# Altium PCB ECE315.PcbDoc (part 1 of 2)
Units mm, origin at the board's own origin, x right, y up, seen from the top; angles counter-clockwise.
Board outline 100.25 x 100.25 mm, 2 copper layers (Top Layer, Bottom Layer); 67 components, 52 nets, 224 pads, 120 vias.
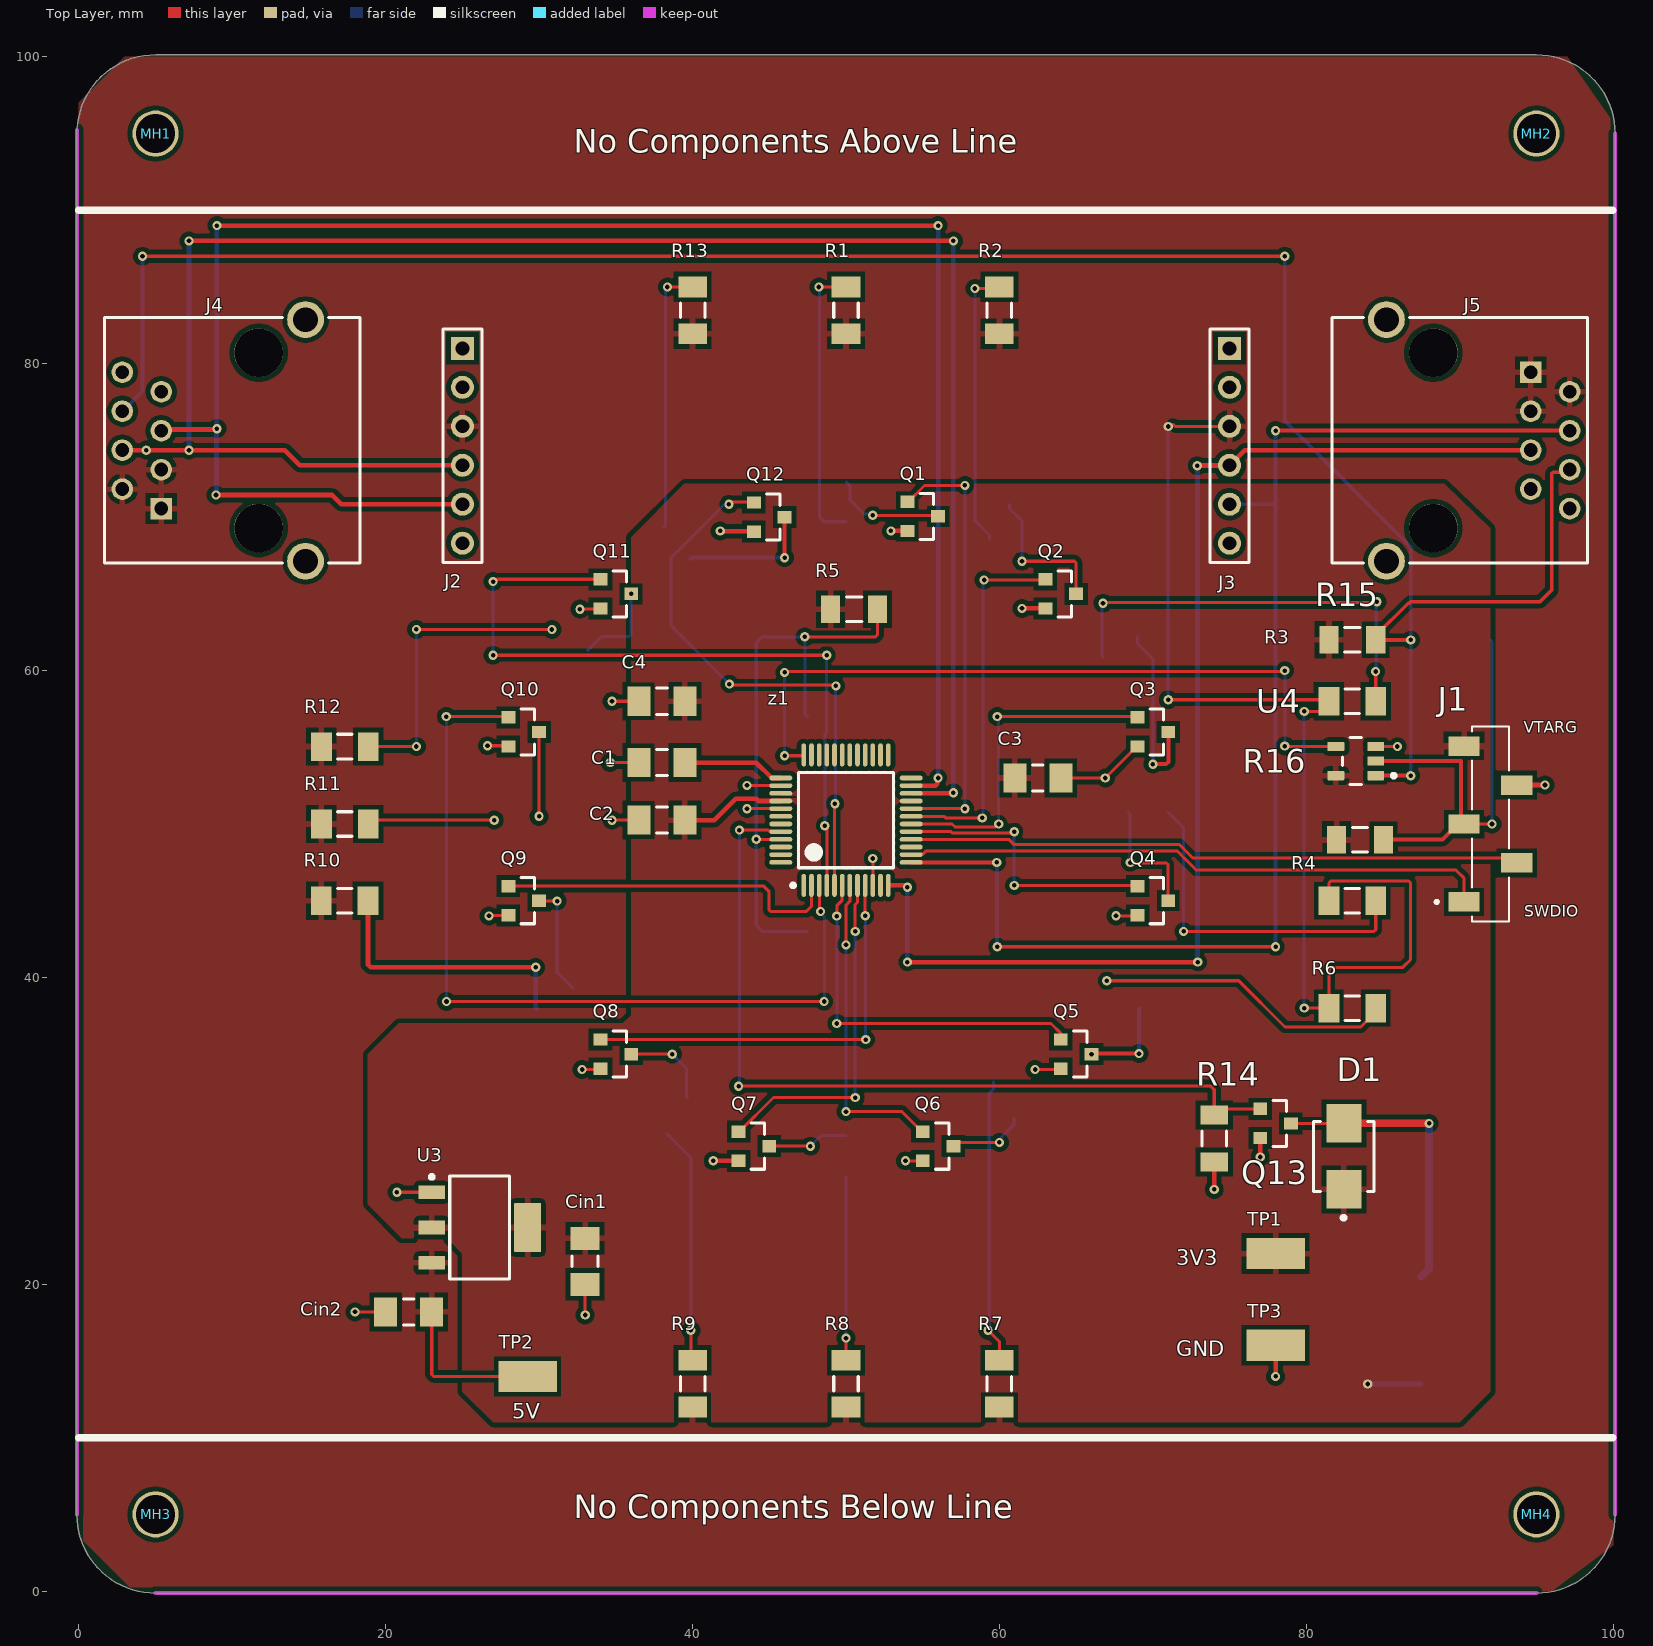
[diagram p0: Top Layer view]
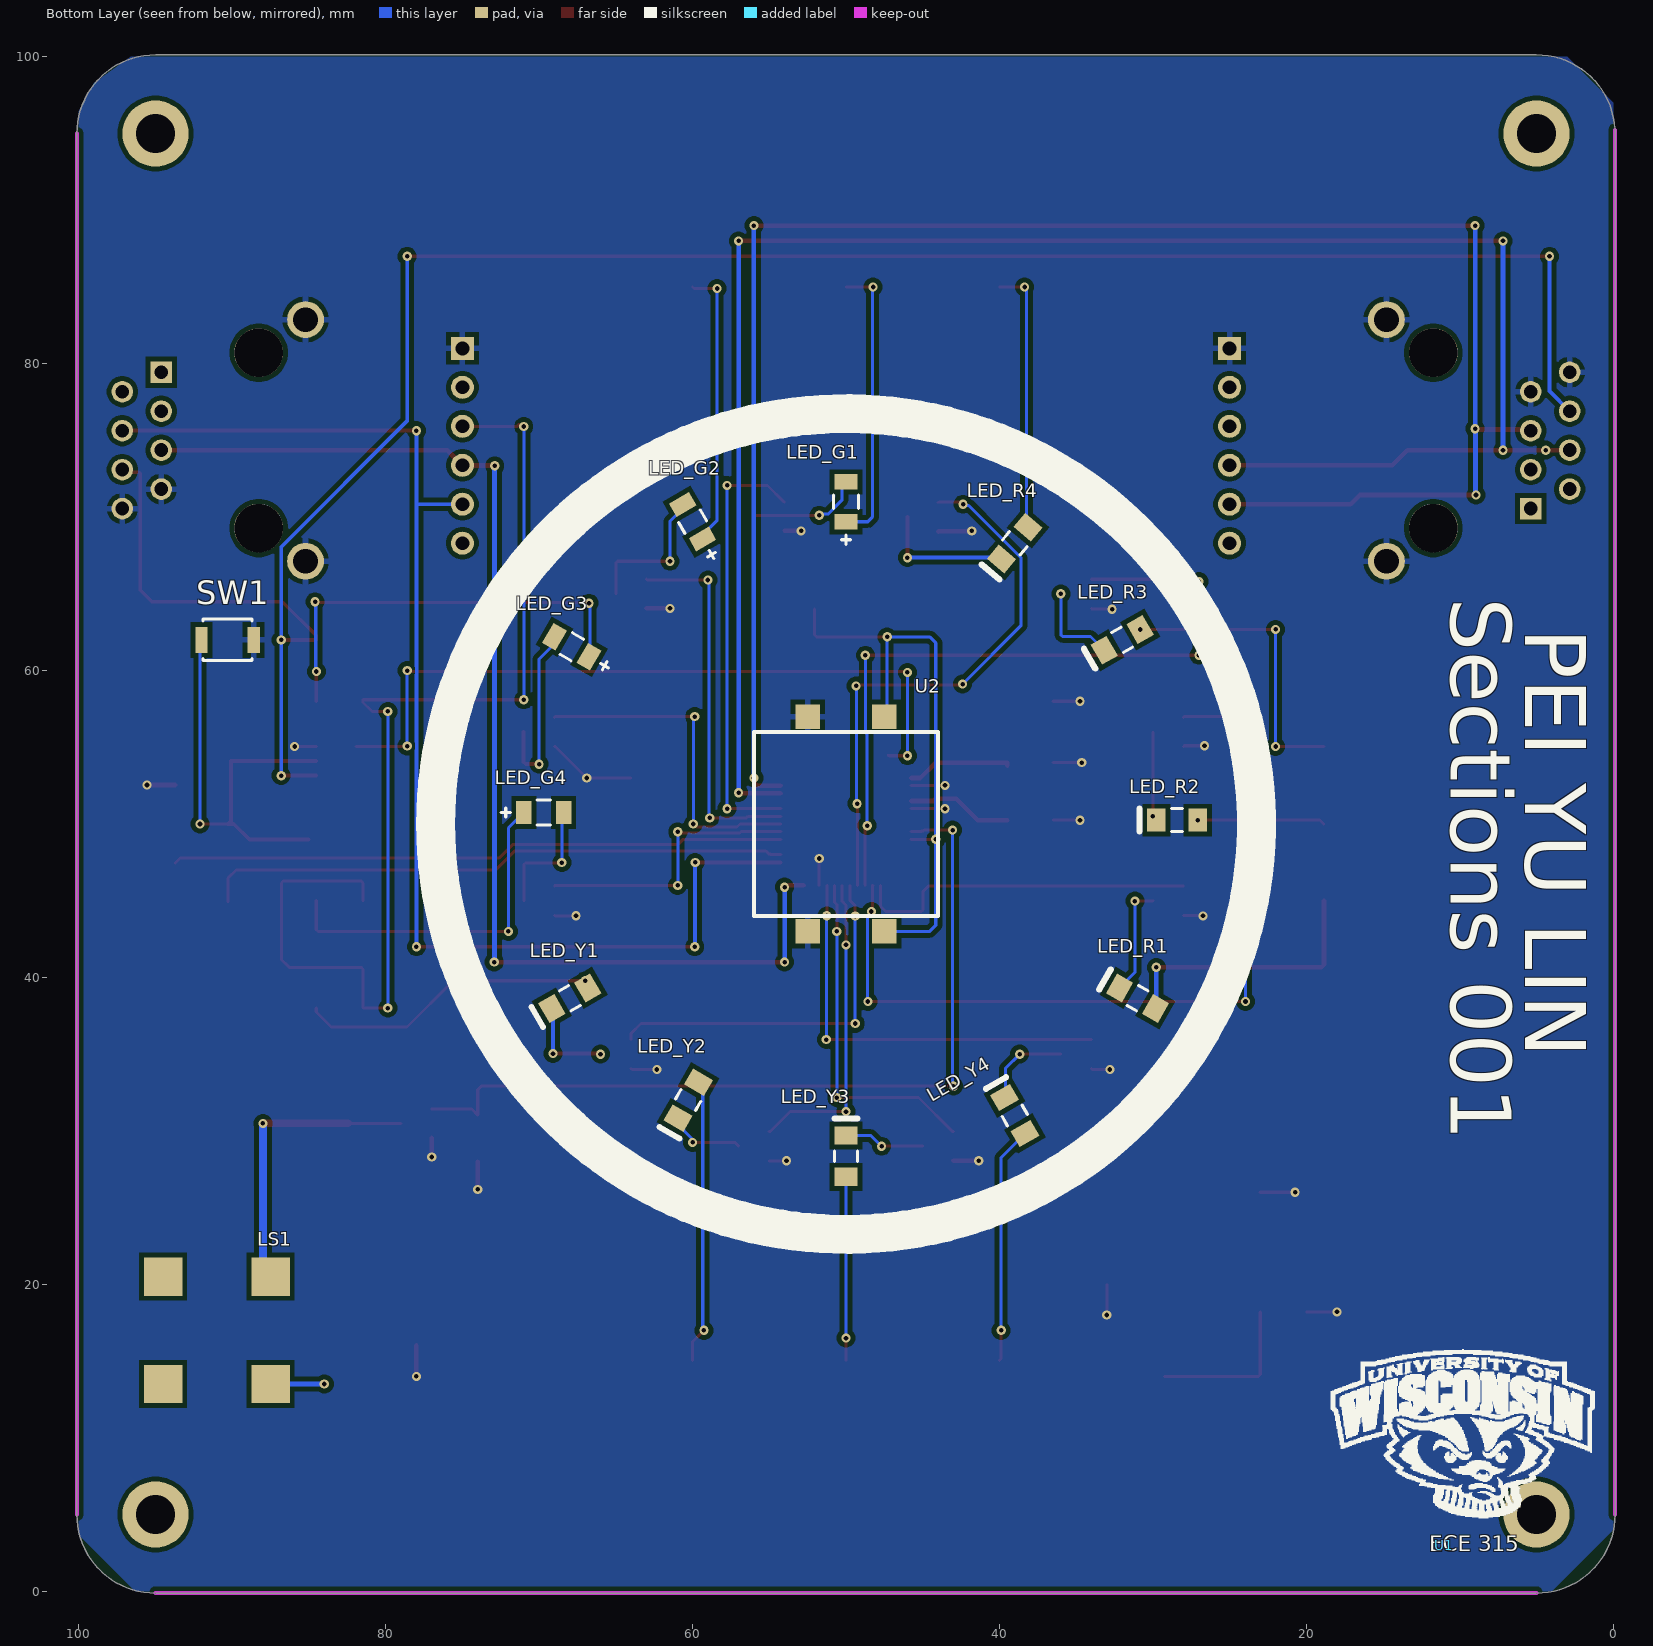
[diagram p1: Bottom Layer view, seen from below]
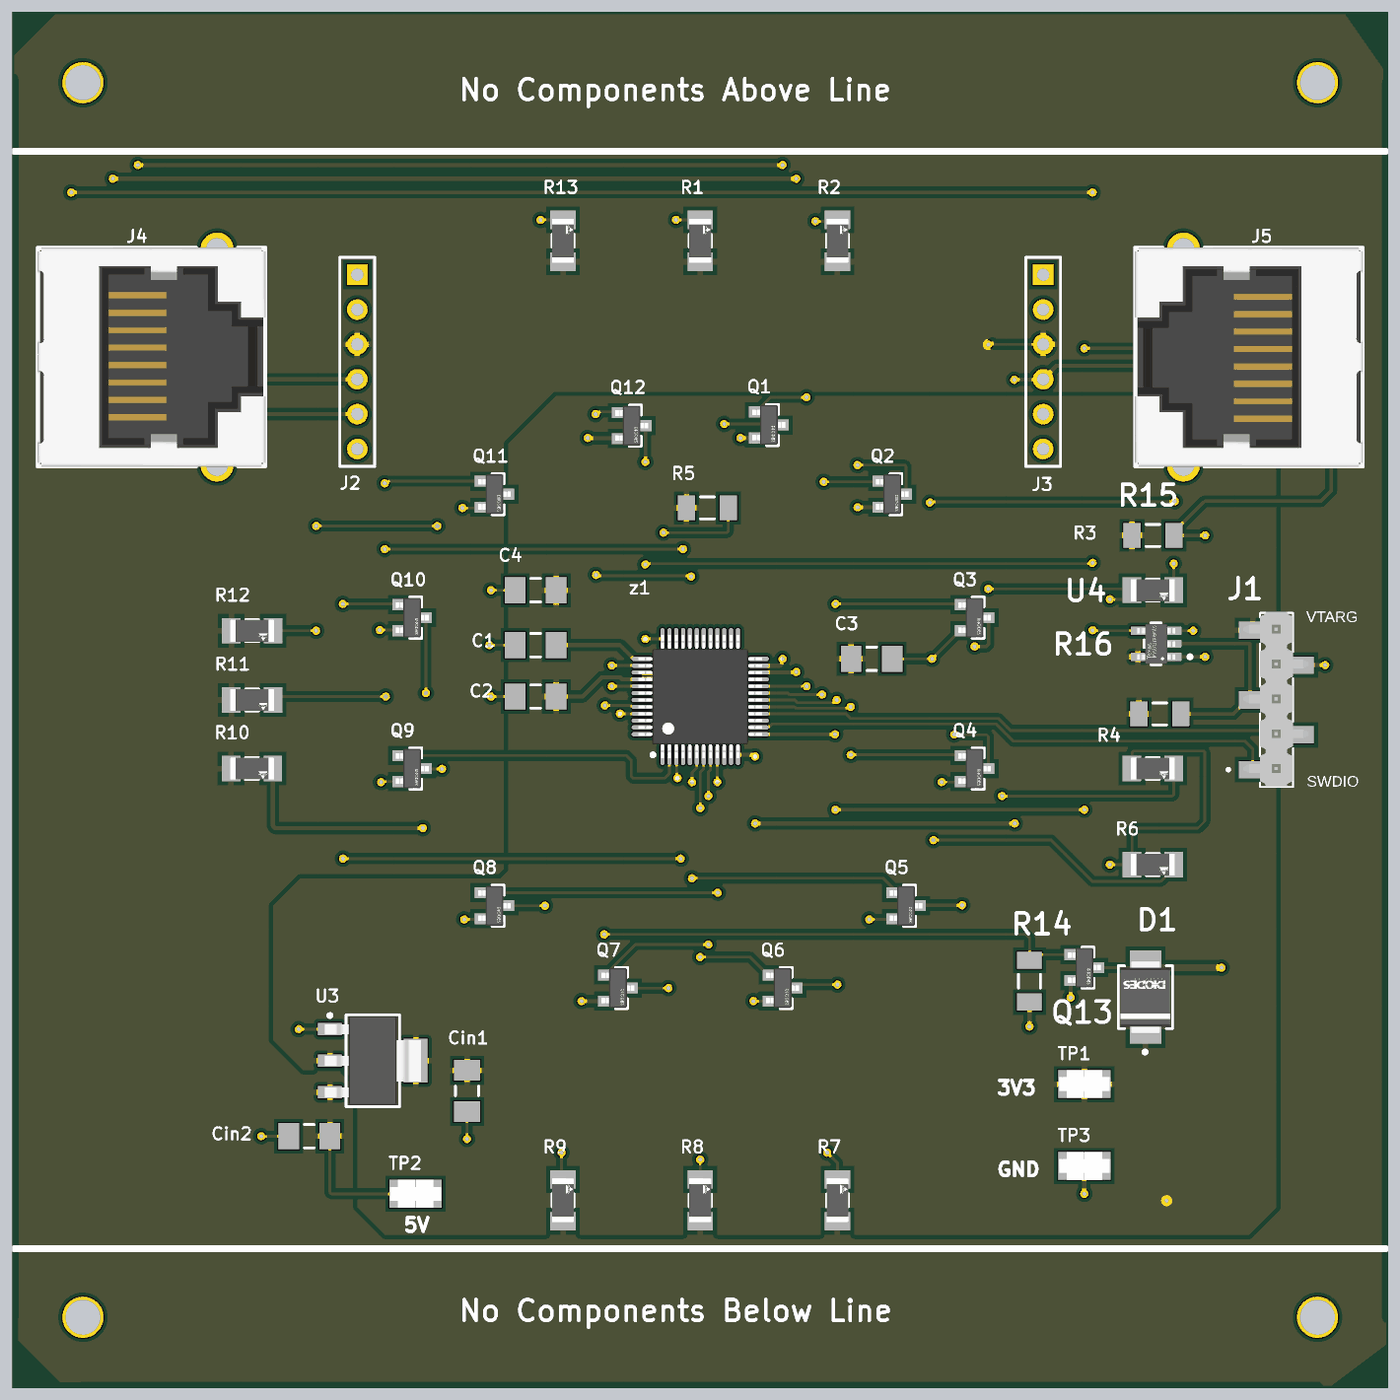
[diagram p2: 3D render of the assembled board from above, using the file's embedded part models]

## Layer stack, top to bottom
Top Solder: solder mask 0.0102, Solder Resist, Dk 3.5
Top Layer: signal copper 0.0356
Dielectric1: dielectric 0.32, FR-4, Dk 4.8
Bottom Layer: signal copper 0.0356
Bottom Solder: solder mask 0.0102, Solder Resist, Dk 3.5

## Board outline
-0.127,4.999 ccw(c5,5) 5,-0.127 95,-0.127 ccw(c95,5) 100.127,5 100.127,95 ccw(c95,95) 95.001,100.127 95,100.127 5,100.127 4.999,100.127 ccw(c5,95) -0.119,95.296 -0.127,95.25

## Design rules (kind name [scope] priority, off if disabled: settings)
Clearance Polygon_Clearance [All vs InPolygon] p1: gap=0.3 ignorepadtopadclearanceinfootprint=FALSE
Clearance [All] p2: gap=0.2 ignorepadtopadclearanceinfootprint=TRUE
ComponentClearance [InComponent('U3')] p1: gap=0 collisioncheckmode=3 verticalgap=0.254 showdistances=FALSE
Height [All] p1: minheight=0 maxheight=75 prefheight=12.7
HoleSize [All] p1: absolutevalues=TRUE maxlimit=6.35 minlimit=0.3 maxpercent=80.000 minpercent=20.000
MinimumAnnularRing [All] p1: minimumring=0.15
MinimumSolderMaskSliver [All] p1: minsoldermaskwidth=0.22
NetAntennae NetAntennae_5.0V [InNet('5.0V')] p1: netantennaetolerance=0
NetAntennae NetAntennae_3.3V [InNet('3.3V')] p2: netantennaetolerance=0
PlaneClearance [All] p1: clearance=0.3
PlaneConnect [All] p1: planeconnectstyle=Relief reliefexpansion=0.3 reliefentries=4 reliefconductorwidth=0.3 reliefairgap=0.3
PolygonConnect ViaConnect [All vs IsVia] p1: connectstyle=Direct reliefconductorwidth=0.381 reliefentries=4 polygonreliefangle="90 Angle" airgapwidth=0.254
PolygonConnect [All] p2: connectstyle=Relief reliefconductorwidth=0.4 reliefentries=4 polygonreliefangle="90 Angle" airgapwidth=0.3
RoutingVias [All] p1: holewidth=0.3 width=0.6 viastyle="Through Hole" minholewidth=0.3 minwidth=0.6 maxholewidth=5 maxwidth=10
SilkToSilkClearance [All] p1: silktosilkclearance=0
SilkToSolderMaskClearance [IsPad] p1: minsilkscreentomaskgap=0 clearancetoexposedcopper=TRUE
SolderMaskExpansion [All] p1: expansion=0.102 istentingtop=FALSE
UnConnectedPin [All] p1:
Width [All] p1: maxlimit=10 minlimit=0.2 preferedwidth=0.6
21 further rules are at their usual default settings.

## Components (designator, comment, footprint, x,y, rotation, side; value= is the part's Value field where it differs from the comment)
C1 "C1206C105K3RACTU" CAPC3216X180X50ML20T25 38,54 r180 top
C2 "C1206C105K3RACTU" CAPC3216X180X50ML20T25 38,50.25 r180 top
C3 "C1206C105K3RACTU" CAPC3216X180X50ML20T25 62.5,53 r0 top
C4 "C1206C105K3RACTU" CAPC3216X180X50ML20T25 38,58 r180 top
Cin1 "C1206C105K3RACTU" CAPC3216X180X50ML20T25 33,21.5 r270 top
Cin2 "C1206C105K3RACTU" CAPC3216X180X50ML20T25 21.5,18.2 r180 top
D1 "B340LB-13-F" FP-SMB-MFG 82.452,28.337 r90 top value=180pF
J1 "10129380-905002BLF" AMPHENOL_10129380-905002BLF 92,50 r90 top
J2 "" HDR1X6 25,81 r270 top locked
J3 "" HDR1X6 75,81 r270 top locked
J4 "615008138221" 615008138221 10,75 r90 top locked
J5 "615008138221" 615008138221 90,75 r270 top locked
LED_G1 "SML-LX1206GC-TR" FP-SML-LX1206GC-TR-MFG 50,71 r90 bottom
LED_G2 "SML-LX1206GC-TR" FP-SML-LX1206GC-TR-MFG 60,69.7 r60 bottom
LED_G3 "SML-LX1206GC-TR" FP-SML-LX1206GC-TR-MFG 67.874,61.55 r30 bottom
LED_G4 "SML-LX1206GC-TR" FP-SML-LX1206GC-TR-MFG 69.7,50.75 r180 bottom
LED_R1 "SML-LX1206IC-TR" LUMX-SML-LX1206IC_V 31,38.65 r30 bottom
LED_R2 "SML-LX1206IC-TR" LUMX-SML-LX1206IC_V 28.425,50.25 r0 bottom
LED_R3 "SML-LX1206IC-TR" LUMX-SML-LX1206IC_V 32,62 r330 bottom
LED_R4 "SML-LX1206IC-TR" LUMX-SML-LX1206IC_V 39,68.3 r310 bottom
LED_Y1 "SML-LX1206YC-TR" LUMX-SML-LX1206YC-TR_V 68,38.65 r330 bottom
LED_Y2 "SML-LX1206YC-TR" LUMX-SML-LX1206YC-TR_V 60.288,32 r300 bottom
LED_Y3 "SML-LX1206YC-TR" LUMX-SML-LX1206YC-TR_V 50,28.35 r90 bottom
LED_Y4 "SML-LX1206YC-TR" LUMX-SML-LX1206YC-TR_V 39,31 r60 bottom
LS1 "CMT-8540S-SMT" CUI_CMT-8540S-SMT 91,17 r180 bottom
MH1 "MHOLE_2_55MM" MHOLE_2_55MM#1 10,90 r0 top locked
MH2 "MHOLE_2_55MM" MHOLE_2_55MM#2 90,90 r0 top locked
MH3 "MHOLE_2_55MM" MHOLE_2_55MM#3 10,10 r0 top locked
MH4 "MHOLE_2_55MM" MHOLE_2_55MM#4 90,10 r0 top locked
Q1 "2N7002-7-F" FP-SOT23-MFG 55,70.05 r0 top
Q2 "2N7002-7-F" FP-SOT23-MFG 64,65 r0 top
Q3 "2N7002-7-F" FP-SOT23-MFG 70,56 r0 top
Q4 "2N7002-7-F" FP-SOT23-MFG 70,45 r0 top
Q5 "2N7002-7-F" FP-SOT23-MFG 65,35 r0 top
Q6 "2N7002-7-F" FP-SOT23-MFG 56,29 r0 top
Q7 "2N7002-7-F" FP-SOT23-MFG 44,29 r0 top
Q8 "2N7002-7-F" FP-SOT23-MFG 35,35 r0 top
Q9 "2N7002-7-F" FP-SOT23-MFG 29,45 r0 top
Q10 "2N7002-7-F" FP-SOT23-MFG 29,56 r0 top
Q11 "2N7002-7-F" FP-SOT23-MFG 35,65 r0 top
Q12 "2N7002-7-F" FP-SOT23-MFG 45,70 r0 top
Q13 "2N7002-7-F" FP-SOT23-MFG 78,30.487 r0 top
R1 "CRCW1206330RFKEA" FP-CRCW1206-e3-IPC_A 50,83.474 r90 top
R2 "CRCW1206330RFKEA" FP-CRCW1206-e3-IPC_A 60,83.474 r90 top
R3 "CRCW1206330RFKEA" FP-CRCW1206-e3-IPC_A 83,58 r0 top
R4 "CRCW1206330RFKEA" FP-CRCW1206-e3-IPC_A 83,45 r0 top
R5 "RC1206FR-0710KL" RESC3116X65X40ML10T20 50.525,64 r180 top
R6 "CRCW1206330RFKEA" FP-CRCW1206-e3-IPC_A 83,38 r0 top
R7 "CRCW1206330RFKEA" FP-CRCW1206-e3-IPC_A 60,13.526 r90 top
R8 "CRCW1206330RFKEA" FP-CRCW1206-e3-IPC_A 50,13.526 r90 top
R9 "CRCW1206330RFKEA" FP-CRCW1206-e3-IPC_A 40,13.526 r90 top
R10 "CRCW1206330RFKEA" FP-CRCW1206-e3-IPC_A 17.321,45 r0 top
R11 "CRCW1206330RFKEA" FP-CRCW1206-e3-IPC_A 17.336,50 r0 top
R12 "CRCW1206330RFKEA" FP-CRCW1206-e3-IPC_A 17.336,55.05 r0 top
R13 "CRCW1206330RFKEA" FP-CRCW1206-e3-IPC_A 40,83.474 r90 top
R14 "RC1206FR-0710KL" RESC3116X65X40ML10T20 74,29.5 r90 top
R15 "RC1206FR-0710KL" RESC3116X65X40ML10T20 83.001,62 r180 top
R16 "RC1206FR-0710KL" RESC3116X65X40ML10T20 83.5,48.979 r180 top
SW1 "B3U-1000P" FP-B3U-1000P-MFG 90.3,62 r0 bottom
TP1 "5019" KSTN-5019_V 78,22 r180 top
TP2 "5019" KSTN-5019_V 29.25,14 r0 top
TP3 "5019" KSTN-5019_V 78,16.03 r180 top
U1 "Bucky" WalkingBucky 11,3 r180 bottom
U2 "TL3300DF160Q" TL3300DF160Q 50,50 r90 bottom
U3 "TLV1117LV33DCYR" DCY0004A_N 26.125,23.7 r0 top
U4 "SN74AHC1G08DBVR" FP-DBV0005A-MFG 83.226,54.1 r180 top
z1 "CY8C4045AZI-S413" TQFP48_7X7 50,50.25 r90 top

## Footprints (in the part's own frame and the unit in brackets; to place one, negate y for a bottom-side part, rotate by r counter-clockwise, add the part's x,y. Pads: shape width x height; smd on the part's side, far side on the other; paste and mask are expansions set on the pad)
615008138221 [mm] "Modular Jack Vertical Shielded 8P8C Front Post"
  rect 1.4x1.4 hole 0.9: 1(-4.445,4.625)
  round 1.4 hole 0.9: 2(-3.175,7.165) 3(-1.905,4.625) 4(-0.635,7.165) 5(0.635,4.625) 6(1.905,7.165) 7(3.175,4.625) 8(4.445,7.165)
  round 3.17 hole 3.17 unplated: MH1(-5.715,-1.725) MH2(5.715,-1.725)
  round 2.4 hole 1.6: S1(-7.875,-4.775) S2(7.875,-4.775)
  silkscreen extent -8,-8.33 8,8.32, body extent -8,-8.32 8,8.33, height 16.62
AMPHENOL_10129380-905002BLF [mm]
  rect 1.27x2.03 smd mask+0.05: 1(-5.08,1.715) 2(-2.54,-1.715) 3(0,1.715) 4(2.54,-1.715) 5(5.08,1.715)
  silkscreen extent -6.35,-1.22 6.35,3.6, body extent -6.27,-2.38 6.43,2.41, height 12.07
CAPC3216X180X50ML20T25 [mm] "Chip Capacitor, 2-Leads, Body 3.40x1.80mm, IPC Low Density"
  rect 1.5x1.9 smd: 1(-1.5,0) 2(1.5,0)
  silkscreen extent -0.35,-0.85 0.35,0.85, body extent -1.7,-0.9 1.7,0.9, height 1.8
CUI_CMT-8540S-SMT [mm]
  rect 2.5x2.5 smd: M1(-3.5,3.5) M2(-3.5,-3.5) N(3.5,3.5) P(3.5,-3.5)
DCY0004A_N [mm] "SOT223, 4-Leads, Body 6.7x3.7mm, Pitch 2.3mm, IPC Medium Density"
  rrect11% 1.75x0.9 smd: 1(-3.125,2.3) 2(-3.125,0) 3(-3.125,-2.3)
  rrect6% 1.75x3.2 smd: 4(3.125,0)
  silkscreen extent -3.25,-3.35 1.95,3.42, body extent -3.5,-3.25 3.5,3.25, height 1.62
FP-B3U-1000P-MFG [mm]
  rect 0.8x1.7 smd paste+0 mask+0: 1(-1.7,0) 2(1.7,0)
  silkscreen extent -1.6,-1.35 1.6,1.35, body extent -2,-1.26 2,1.24, height 1.6
FP-CRCW1206-e3-IPC_A [mm]
  rect 1.356x1.858 smd paste+0 mask+0: 1(-1.526,0) 2(1.526,0)
  silkscreen extent -0.47,-0.8 0.47,0.8, body extent -2.7,-1.43 2.7,1.43, height 0.25
FP-DBV0005A-MFG [mm]
  rrect17% 1.1x0.6 smd paste+0 mask+0: 1(-1.3,0.95) 2(-1.3,0) 3(-1.3,-0.95)
  rrect17% 1.1x0.6 smd paste+0: 4(1.3,-0.95)
  rrect17% 1.1x0.6 smd paste+0 mask+0.102: 5(1.3,0.95)
  silkscreen extent -2.6,-1.53 0.87,1.52, body extent -1.95,-1.78 1.95,1.78, height 0.25
FP-SMB-MFG [mm]
  rect 2.5x2.3 smd paste+0 mask+0: 1(-2.15,0) 2(2.15,0)
  silkscreen extent -4.12,-1.97 2.28,1.97, body extent -2.65,-1.81 2.64,1.81, height 2.5
FP-SML-LX1206GC-TR-MFG [mm]
  rect 1x1.5 smd paste+0 mask+0: 1(-1.3,0) 2(1.3,0)
  silkscreen extent -2.78,-0.81 0.43,0.81, body extent -1.6,-0.75 1.6,0.75, height 1.13
FP-SOT23-MFG [mm]
  rect 0.9x0.8 smd paste+0 mask+0: 1(-1,0.95) 2(-1,-0.95) 3(1,0)
  silkscreen extent -0.18,-1.5 0.7,1.5, body extent -1.55,-1.6 1.55,1.6, height 0.25
HDR1X6 [mm] "Connector; Header; 6 Position"
  rect 1.5x1.5 hole 0.9: 1(0,0)
  round 1.5 hole 0.9: 2(2.54,0) 3(5.08,0) 4(7.62,0) 5(10.16,0) 6(12.7,0)
  silkscreen extent -1.27,-1.27 13.97,1.27
KSTN-5019_V [mm] "Test Point, 1-Leads, Body 3.81x2.03mm"
  rect 3.8x2.03 smd: 1(0,0)
  body extent -1.9,-1.01 1.9,1.02, height 2.29
LUMX-SML-LX1206IC_V [mm] "SMD, 2-Leads, Body 3.2x1.5mm"
  rect 1.2x1.5 smd: 1(-1.35,0) 2(1.35,0)
  silkscreen extent -0.35,-0.75 2.45,0.75, body extent -1.6,-0.8 1.6,0.8, height 1.1
LUMX-SML-LX1206YC-TR_V [mm] "SMD, 2-Leads, Body 3.2x1.5mm"
  rect 1.2x1.5 smd: 1(-1.35,0) 2(1.35,0)
  silkscreen extent -0.35,-0.75 2.45,0.75, body extent -1.6,-0.75 1.6,0.75, height 1.25
MHOLE_2_55MM#1 [mm]
  round 3 / inner round 4.572 / far side round 4.318 hole 2.55: 1(-5,5)
MHOLE_2_55MM#2 [mm]
  round 3 / inner round 4.572 / far side round 4.318 hole 2.55: 1(5,5)
MHOLE_2_55MM#3 [mm]
  round 3 / inner round 4.572 / far side round 4.318 hole 2.55: 1(-5,-5)
MHOLE_2_55MM#4 [mm]
  round 3 / inner round 4.572 / far side round 4.318 hole 2.55: 1(5,-5)
RESC3116X65X40ML10T20 [mm] "Chip Resistor, 2-Leads, Body 3.10x1.60mm, IPC Low Density"
  rect 1.25x1.8 smd: 1(-1.525,0) 2(1.525,0)
  silkscreen extent -0.5,-0.8 0.5,0.8, body extent -1.6,-0.85 1.6,0.85, height 0.65
TL3300DF160Q [mm] "SWITCH TACTILE SPST-NO 0.05A 12V"
  rect 1.6x1.6 smd: 1(-7,2.5) 2(7,2.5) 3(-7,-2.5) 4(7,-2.5)
  silkscreen extent -6,-6 6,6, body extent -7.51,-6.03 7.49,5.97, height 4.3
TQFP48_7X7 [mm] "Infineon PSoC6 QFP48"
  oval 1.5x0.3 smd: 1(-4.25,2.75) 2(-4.25,2.25) 3(-4.25,1.75) 4(-4.25,1.25) 5(-4.25,0.75) 6(-4.25,0.25) 7(-4.25,-0.25) 8(-4.25,-0.75) 9(-4.25,-1.25) 10(-4.25,-1.75) 11(-4.25,-2.25) 12(-4.25,-2.75) 25(4.25,-2.75) 26(4.25,-2.25) 27(4.25,-1.75) 28(4.25,-1.25) 29(4.25,-0.75) 30(4.25,-0.25) 31(4.25,0.25) 32(4.25,0.75) 33(4.25,1.25) 34(4.25,1.75) 35(4.25,2.25) 36(4.25,2.75)
  oval 0.3x1.5 smd: 13(-2.75,-4.25) 14(-2.25,-4.25) 15(-1.75,-4.25) 16(-1.25,-4.25) 17(-0.75,-4.25) 18(-0.25,-4.25) 19(0.25,-4.25) 20(0.75,-4.25) 21(1.25,-4.25) 22(1.75,-4.25) 23(2.25,-4.25) 24(2.75,-4.25) 37(2.75,4.25) 38(2.25,4.25) 39(1.75,4.25) 40(1.25,4.25) 41(0.75,4.25) 42(0.25,4.25) 43(-0.25,4.25) 44(-0.75,4.25) 45(-1.25,4.25) 46(-1.75,4.25) 47(-2.25,4.25) 48(-2.75,4.25)
  silkscreen extent -4.37,-3.1 3.1,3.57, body extent -4.5,-4.5 4.5,4.5, height 1.4
WalkingBucky [mm]
  silkscreen extent -7.42,1.75 9.8,12.73

## Part data
C1 C2 C3 C4 Cin1 Cin2: library part CMP-2000-04991-1, "Chip Capacitor, 1 uF, +/- 10%, 25 V, -55 to 125 degC, 1206 (3216 Metric), RoHS, Tape and Reel", Capacitance=1uF, Capacitance - nF=1000nF, Case Code - in=1206, Case Code - mm=3216, Case Height=1.6mm, Case Length=3.2mm, Dielectric=X7R, Manufacturer=Kemet, Maximum Operating Temperature=+125C, Minimum Operating Temperature=-55C, Operating Temperature Range=-55Cto+125C, Package / Case=1206(3216metric), Package Description="2-Pin Surface Mount Device, Body 3.2 x 1.6 mm", Temperature Coefficient / Code=+/-15%, Tolerance=10%, Voltage Rating=25V, Brand=Kemet, Case Width=1.6mm, Class=Class1, Datasheet URL=https://ciiva.com/datasheet-click-18194173?src=ciiva&sig=6daff8c4, Datasheet Version=Jul-14, Dimensions=1.6mmWx3.2mmLx1.6mmH, Factory Pack Quantity=2000, Manufacturer URL=http://www.kemet.com/, Package Reference=1206, Packaging=Reel, Product=GeneralTypeMLCCs, Product Category=MultilayerCeramicCapacitorsMLCC-SMD/SMT, RoHS=Details, Series=C1206C, Termination Style=SMD/SMT, Type=SMDMLCCX7R6.3-250VDCCommericalGrade, Voltage Rating DC=25V
D1: library part CMP-12790-000022-1, "DIODE SCHOTTKY 40V 3A SMB", Average Rectified Current=3A, Capacitance=180pF, Case/Package=SMB, Forward Voltage=450mV, Manufacturer="Diodes Inc.", Max Forward Surge Current (Ifsm)=70A, Max Junction Temp=+150°C, Max Operating Temperature=125°C, Max Repetitive Reverse Voltage=40V, Max Reverse Current=2mA, Min Operating Temperature=-55°C, Package Quantity=3000, Supplier Part Number 1=B340LB-FDICT-ND, Temperature="-55°C to +150°C", Automotive=No, Category=Diode, ComponentLink1Description=https://datasheet.ciiva.com/4715/ds30240-71143-4715794.pdf?src-supplier=Mouser, ComponentLink1URL=https://datasheet.ciiva.com/4715/ds30240-71143-4715794.pdf?src-supplier=Mouser, ComponentLink2Description=Datasheet, ComponentLink2URL=https://www.diodes.com/assets/Datasheets/ds30240.pdf, ComponentLink3Description=https://datasheet.ciiva.com/26949/getdatasheetpartid-146318-26949355.pdf?src-supplier=Verical, ComponentLink3URL=https://datasheet.ciiva.com/26949/getdatasheetpartid-146318-26949355.pdf?src-supplier=Verical, ComponentLink4Description=https://datasheet.ciiva.com/1177/ds30240-1177479.pdf?src-supplier=Element14, ComponentLink4URL=https://datasheet.ciiva.com/1177/ds30240-1177479.pdf?src-supplier=Element14, ComponentLink5Description=https://datasheet.ciiva.com/16380/ds30240-16380877.pdf?src-supplier=Future+Electronics, ComponentLink5URL=https://datasheet.ciiva.com/16380/ds30240-16380877.pdf?src-supplier=Future+Electronics, ComponentLink6Description=https://datasheet.ciiva.com/8303/ds30240-8303077.pdf?src-supplier=Avnet, ComponentLink6URL=https://datasheet.ciiva.com/8303/ds30240-8303077.pdf?src-supplier=Avnet, ComponentLink7Description=https://datasheet.ciiva.com/914/ds30240-914107.pdf?src-supplier=Digi-Key, ComponentLink7URL=https://datasheet.ciiva.com/914/ds30240-914107.pdf?src-supplier=Digi-Key, ComponentLink8Description=https://datasheet.ciiva.com/914/ds30240-914108.pdf?src-supplier=Digi-Key, ComponentLink8URL=https://datasheet.ciiva.com/914/ds30240-914108.pdf?src-supplier=Digi-Key, ComponentLink9Description=https://datasheet.ciiva.com/914/ds30240-914106.pdf?src-supplier=Digi-Key, ComponentLink9URL=https://datasheet.ciiva.com/914/ds30240-914106.pdf?src-supplier=Digi-Key, Current=3A, Current Rating=3A, Device Class L1="Discrete Semiconductors", Device Class L2=Diodes, Device Class L3="Schottky Diodes", Digikey Description="DIODE SCHOTTKY 40V 3A SMB", Element Configuration=Single, Footprint Url=https://www.diodes.com/assets/Package-Files/SMB.pdf, Forward Current=3A, Height=2.5mm, Lead Free=Yes, Length=4.57mm, Manufacturer Part Number=B340LB-13-F, Max Repetitive Reverse Voltage (Vrrm)=40V, Max Reverse Voltage (DC)=40V, Max Surge Forward Current=70A, Mount="Surface Mount", Mouser Description="Schottky Diodes & Rectifiers 40V 3A", Number of Pins=2, Octopart=https://octopart.com/b340lb-13-f-diodes+inc.-325823, Output Current=3A, Package=SMB, Packaging="Tape and Reel", Peak Non-Repetitive Surge Current=70A, Peak Reverse Current=2mA, Polarity=Standard, Pricing 1="1=0.43000, 10=0.36500, 100=0.27250, 500=0.21414, 1000=0.16547 (USD)", Radiation Hardening=No, Reach SVHC Compliant=Yes, Reverse Voltage=40V, RoHS=TRUE, RoHS Compliant=Yes, Series=-, Standoff Height=0.05mm, Stock 1=168517, Supplier 1=Digi-Key, Supplier 2=Newark, Supplier Part Number 2=12T1468, Temperature Range High=+150°C, Temperature Range Low=-55°C, Termination=SMD/SMT, Voltage=40V, Voltage Rating (DC)=40V, Weight=0.00328oz, Width=3.94mm
J1: "Conn Unshrouded Header HDR 5 POS 2.54mm Solder ST SMD Poly Bag", Manufacturer 1=ICC, Package=None, Supplier Part Number 1=10129380-905002BLF-ND, Availability="In Stock", Check_prices=https://www.snapeda.com/parts/10129380-905002BLF/Amphenol/view-part/?ref=eda, Manufacturer Part Number 1=10129380-905002BLF, MF="AMPHENOL ICC / FCI", MP=10129380-905002BLF, Price=None, Purchase-URL=https://pricing.snapeda.com/search/part/10129380-905002BLF/?ref=eda, RoHS=No, SnapEDA_Link=https://www.snapeda.com/parts/10129380-905002BLF/Amphenol/view-part/?ref=snap, Supplier 1=Digi-Key
J2 J3: library part CONN_HEADER_MALE_1x6, "Female, 6C, Rt Angle, .100\"CC; 3.15mm Tail, No Mounting; PBT, Phos. Bronze, 105 C", Color=Black, Flammability Rating="UL94 V-0", Manufacturer 1=Sullins, Manufacturer Part Number 1=PPPC061LGBN-RC, Max Operating Temperature=105°C, Min Operating Temperature=-40°C, Package Quantity=1000, Supplier Part Number 1=S5481-ND, Voltage Rating=250V, Category=Connectors, ComponentLink1Description=https://media.digikey.com/pdf/Data%20Sheets/Sullins%20PDFs/Female_Headers.100_DS.pdf?src-supplier=Digi-Key, ComponentLink1URL=https://media.digikey.com/pdf/Data%20Sheets/Sullins%20PDFs/Female_Headers.100_DS.pdf?src-supplier=Digi-Key, ComponentLink2Description=http://www.sullinscorp.com/catalogs/78_Page80-81_HEADER_.100_2.54mm_FEMALE.pdf?src-supplier=Future+Electronics, ComponentLink2URL=http://www.sullinscorp.com/catalogs/78_Page80-81_HEADER_.100_2.54mm_FEMALE.pdf?src-supplier=Future+Electronics, Connector Type=Header, Contact Finish - Mating=GOLD, Contact Material=Bronze, Contact Plating=Gold, Contact Shape=Square, Contact Type="Female Socket", Fastening Type=Pull, Height=2.4mm, Housing Color=Black, Housing Material=Plastic, Insulation Color=Black, Insulation Material=Polyester, Lead Free="Lead Free", Length=15.7mm, Mount="Through Hole", Number of Positions=6, Number of Rows=1, Packaging=Bulk, Pitch=0.1inch, Pricing 1="1=0.66, 10=0.56, 80=0.50288, 440=0.41148, 1000=0.36576, 5000=0.3302 (USD)", RoHS=Yes, RoHS Compliant=Yes, Series=-, Stock 1=12284, Supplier 1=Digi-Key, Termination=Solder, Width=8.5mm
J4 J5: library part CMP-1502-01731-1, "Modular Jack WR-MJ, Front Post, Shielded, Vertical Entry, THT, 8P8C", Contact Resistance=20mOhm, Manufacturer="Wurth Elektronik", Operating Temperature=-40to85degC, Rated Current=1.5A, Withstanding Voltage=1000VAC, Working Voltage=120VAC, Compliance=Leadfree/RoHS, Datasheet URL=https://katalog.we-online.com/em/datasheet/615008138221.pdf, Entrance=Vertical, Manufacturer URL=http://www.we-online.de, Mounting Technology=THT, Package Reference=615008138221, Packaging=Tray, Part Number=615008138221, Pin Number=8P8C, Port=1x1, Publisher=WurthElektronik
LED_G1 LED_G2 LED_G3 LED_G4: library part CMP-2000-07122-2, "LED GREEN CLEAR 1206 SMD", Case Code (Imperial)=1206, Case Code (Metric)=3216, Color=Green, Current Rating=25mA, Forward Current=20mA, Forward Voltage=2.2V, Lens Color=Colorless, Max Operating Temperature=85°C, Min Operating Temperature=-40°C, Package Quantity=1, Power Rating=65mW, Approvals=UL, Case/Package=1206, Dominant Wavelength=565nm, Height=1.1mm, Illumination Color=Green, Lead Free="Lead Free", Length=3.2mm, Lens Style=Rectangular, Lens Transparency=Clear, Luminous Intensity=10mcd, Mount="Surface Mount", Number of LEDs=1, Number of Pins=2, Packaging="Tape and Reel", REACH SVHC="No SVHC", RoHS Compliant=Yes, Test Current=20mA, Viewing Angle=160°, Wavelength=565nm, Width=1.6mm
LED_R1 LED_R2 LED_R3 LED_R4: library part CMP-2000-07123-1, "LED Red, 65 mW, -40 to 85 degC, 2-Pin SMD, RoHS, Tape and Reel", Color=Red, Manufacturer=Lumex, Operating Temperature=-25to85C, Package Description="2-Pin Surface Mount Device, Body 3.2 x 1.5 mm", Package Reference=SML-LX1206IC, Reverse Voltage=5(Min)V, Supplier_Package=SMD, Datasheet URL=http://www.lumex.com/content/files/ProductAttachment/SML-LX1206IC-TR.pdf, Datasheet Version="Rev. J, 08/2012", Dimension=3.2x1.6x1.1mm, Dominant Wavelength=N/A, ECCN=EAR99, Family=SML-LX1206IC, HTS=8541402000, Intensity=6mcd, LED Material=GaAsP, Lens Appearance=ColorlessNonDiffused, Lens Dimensions=2x1.6x0.5mm, Manufacturer URL=http://www.lumexinstruments.com/, Mounting=SurfaceMount, Mounting Technology=SurfaceMount, Number of LEDs=1, Packaging=TapeandReel, Part No=SML-LX1206IC-TR, Peak Wavelength=635nm, Pin_Count=2, RoHS=Unknown, Supplier=Lumex, Supplier Standard Pack=3,000, Type=Uni-Color, Viewing Angle=160
LED_Y1 LED_Y2 LED_Y3 LED_Y4: library part CMP-2000-07124-1, "Yellow LED, Water Clear Len, 585 nm, 2.1 V, -40 to 85 degC, 2-Pin SMD, RoHS, Tape and Reel", Color=Yellow, Current - Test=20mA, Lens Color=Colorless, Manufacturer=Lumex, Millicandela Rating=6mcd, Package / Case=1206(3216Metric), Package Description="2-Pin Surface Mount Device, Body 3.2 x 1.5 mm", Standard Package=3,000, Supplier Device Package=1206, Voltage - Forward (Vf) (Typ)=2.1V, Catalog Drawings=SML-LX1206SeriesTopSML-LX1206SeriesSideSML-LX1206SeriesBottomSML-LX1206SeriesFootprint, Category=Optoelectronics, Datasheet URL=http://www.lumex.com/content/files/ProductAttachment/SML-LX1206YC-TR.pdf, Datasheet Version="Rev. K, 08/2012", Family=LEDIndication-Discrete, Features=-, Height (Max)=1.10mm, Lens Style/Size=RectanglewithFlatTop, Lens Transparency=Clear, Manufacturer URL=http://www.lumexinstruments.com/, Mounting Technology=SurfaceMount, Mounting Type=SurfaceMount, Online Catalog=SML-LX1206RectanglewithFlatTop1206PackageLEDs, Other Names=67-1358-2LU60357TRSMLLX1206YCTR, Package Reference=SML-LX1206YC-TR, Packaging=Tape&Reel(TR), Product Training Modules=LEDsBenefitsofCustomLEDandLCDTechnology, RoHS Information=RoHSCertofCompliance, Series=-, Size / Dimension=3.20mmLx1.60mmW, Viewing Angle=160°, Wavelength - Dominant=-, Wavelength - Peak=585nm
LS1: "AUDIO MAGNETIC XDCR 1-6V SMD", Frequency=4kHz, Manufacturer 1=CUI, Manufacturer Part Number 1=CMT-8540S-SMT-TR, Max Operating Temperature=70°C, Min Operating Temperature=-20°C, Operating Supply Current=150mA, Package="CUI Inc.", Supplier Part Number 1=102-3746-1-ND, Voltage Rating=5V, Availability=Unavailable, Category="Audio Products", ComponentLink1Description=https://www.cui.com/product/resource/digikeypdf/cmt-8540s-smt.pdf?src-supplier=Digi-Key, ComponentLink1URL=https://www.cui.com/product/resource/digikeypdf/cmt-8540s-smt.pdf?src-supplier=Digi-Key, CUI_purchase_URL=https://www.cuidevices.com/product/audio/buzzers/audio-transducers/cmt-8540s-smt-tr?utm_source=snapeda.com&utm_medium=referral&utm_campaign=snapedaBOM, Lead Free="Lead Free", MF="CUI Devices", MP=CMT-8540S-SMT-TR, Price=None, Pricing 1="1=3.23000, 10=2.67000, 25=2.46400, 50=2.31400, 100=2.16990, 500=1.91520 (USD)", RoHS=Yes, Sensing Method=Magnetic, SnapEDA_Link=https://www.snapeda.com/parts/CMT-8540S-SMT-TR/CUI%20Devices/view-part/587791/?ref=snap, Stock 1=66147, Supplier 1=Digi-Key
MH1 MH2 MH3 MH4: "Mounting Holde", Manufacturer Part Number="UW MTHOLE"
Q1 Q2 Q3 Q4 Q5 Q6 Q7 Q8 Q9 Q10 Q11 Q12: library part CMP-2000-04929-2, "MOSFET N-CH 60V 115MA SOT23-3", Case/Package=SOT-23, Continuous Drain Current (ID)=115mA, Drain to Source Breakdown Voltage=70V, Drain to Source Resistance=7.5R, Drain to Source Voltage (Vdss)=60V, Gate to Source Voltage (Vgs)=20V, Input Capacitance=50pF, Max Operating Temperature=150°C, Max Power Dissipation=300mW, Min Operating Temperature=-55°C, Package Quantity=3000, Power Dissipation=540mW, Threshold Voltage=2.5V, Contact Plating=Tin, Current Rating=115mA, Dual Supply Voltage=60V, Element Configuration=Single, Fall Time=5.6ns, Height=1mm, Lead Free="Lead Free", Length=2.9mm, Mount="Surface Mount", Nominal Vgs=2.5V, Number of Channels=1, Number of Elements=1, Number of Pins=3, On-State Resistance=7.5R, Packaging="Tape and Reel", Radiation Hardening=No, Rds On Max=7.5R, REACH SVHC="No SVHC", Rise Time=3ns, Termination=SMD/SMT, Turn-Off Delay Time=11ns, Turn-On Delay Time=7ns, Voltage=60V, Voltage Rating (DC)=60V, Weight=0.000282oz, Width=1.3mm
Q13: library part CMP-2000-04929-2, "MOSFET N-CH 60V 115MA SOT23-3", Case/Package=SOT-23, Continuous Drain Current (ID)=115mA, Drain to Source Breakdown Voltage=70V, Drain to Source Resistance=7.5R, Drain to Source Voltage (Vdss)=60V, Gate to Source Voltage (Vgs)=20V, Input Capacitance=50pF, Manufacturer 1=Diodes, Max Operating Temperature=150°C, Max Power Dissipation=300mW, Min Operating Temperature=-55°C, Package Quantity=3000, Power Dissipation=540mW, Supplier Part Number 1=2N7002-FDICT-ND, Threshold Voltage=2.5V, Category=MOSFETs, ComponentLink1Description=https://datasheet.ciiva.com/15219/getdatasheetpartid-110059-15219667.pdf?src-supplier=Verical, ComponentLink1URL=https://datasheet.ciiva.com/15219/getdatasheetpartid-110059-15219667.pdf?src-supplier=Verical, ComponentLink2Description=https://datasheet.ciiva.com/3304/ds11303-3304385.pdf?src-supplier=Avnet, ComponentLink2URL=https://datasheet.ciiva.com/3304/ds11303-3304385.pdf?src-supplier=Avnet, ComponentLink3Description=https://datasheet.ciiva.com/1188/ds11303-1188363.pdf?src-supplier=Element14, ComponentLink3URL=https://datasheet.ciiva.com/1188/ds11303-1188363.pdf?src-supplier=Element14, ComponentLink4Description=https://datasheet.ciiva.com/22712/1915452-22712375.pdf?src-supplier=Element14, ComponentLink4URL=https://datasheet.ciiva.com/22712/1915452-22712375.pdf?src-supplier=Element14, ComponentLink5Description=https://datasheet.ciiva.com/49020/70437206-49020102.pdf?src-supplier=Allied+Electronics, ComponentLink5URL=https://datasheet.ciiva.com/49020/70437206-49020102.pdf?src-supplier=Allied+Electronics, Contact Plating=Tin, Current Rating=115mA, Drain-source On Resistance-Max=7.5R, Dual Supply Voltage=60V, Element Configuration=Single, Fall Time=5.6ns, Height=1mm, Lead Free="Lead Free", Length=2.9mm, Manufacturer Part Number 1=2N7002-7-F, Mount="Surface Mount", Nominal Vgs=2.5V, Number of Channels=1, Number of Elements=1, Number of Pins=3, On-State Resistance=7.5R, Packaging="Tape and Reel", Polarity=N-CHANNEL, Pricing 1="1=0.20000, 10=0.18600, 100=0.10140, 500=0.06236, 1000=0.04252 (USD)", Radiation Hardening=No, Rds On Max=7.5R, REACH SVHC="No SVHC", Reach SVHC Compliant=Yes, Rise Time=3ns, RoHS=Yes, RoHS Compliant=Yes, Series=-, Stock 1=1441532, Supplier 1=Digi-Key, Termination=SMD/SMT, Turn-Off Delay Time=11ns, Turn-On Delay Time=7ns, Voltage=60V, Voltage Rating (DC)=60V, Weight=0.000282oz, Width=1.3mm
R1 R2 R3 R4 R6 R7 R8 R9 R10 R11 R12 R13: library part CMP-2003-02098-2, "RES Thick Film, 330Ω, 1%, 0.25W, 100ppm/°C, 1206", Case Code (Imperial)=1206, Case Code (Metric)=3216, Max Operating Temperature=155°C, Max Power Dissipation=250mW, Min Operating Temperature=-55°C, Package Quantity=10, Resistance=330R, Temperature Coefficient=100ppm/°C, Tolerance=1%, Voltage Rating=200V, Case/Package=1206, Composition="Thick Film", Contact Plating=Tin, Depth=1.6mm, Features="Automotive AEC-Q200", Height=0.55mm, Lead Free="Lead Free", Length=3.2mm, Military Standard=Not, Mount="Surface Mount", Number of Terminations=2, Packaging="Tape and Reel", Power Rating=250mW, Radiation Hardening=No, Termination=SMD/SMT, Voltage Rating (DC)=200V, Weight=0.000353oz, Width=1.6mm
R5: library part CMP-1014-00623-2, "Chip Resistor, 10 KOhm, +/- 1%, 0.25 W, -55 to 155 degC, 1206 (3216 Metric), RoHS, Tape and Reel", Case Code (Imperial)=1206, Case Code (Metric)=3216, Manufacturer=Yageo, Max Operating Temperature=155degC, Min Operating Temperature=-55degC, Package Description="2-Pin Surface Mount Device, Body 3.1 x 1.6 mm", Package Quantity=5000, Package Reference=1206.0, Power Rating=250mW, Resistance=10KOhm, Temperature Coefficient=100ppm/degreesC, Tolerance=1%, Voltage Rating=200V, Case/Package=1206, Composition=ThickFilm, Datasheet URL=http://www.yageo.com/NewPortal/yageodocoutput?fileName=/pdf/R-Chip/PYu-RC_Group_51_RoHS_L_5.pdf, Datasheet Version="Rev. 5, 10/2016", Depth=1.6mm, Height=0.55mm, Lead Free=LeadFree, Length=3.1mm, Manufacturer URL=http://www.yageo.com/, Military Standard=Not, Packaging=TapeandReel, REACH SVHC=Unknown, RoHSCompliant=true, Termination=SMD/SMT, Width=1.6mm
R14 R15 R16: library part CMP-1014-00623-2, "Chip Resistor, 10 KOhm, +/- 1%, 0.25 W, -55 to 155 degC, 1206 (3216 Metric), RoHS, Tape and Reel", Case Code (Imperial)=1206, Case Code (Metric)=3216, Manufacturer=Yageo, Max Operating Temperature=155degC, Max Power Dissipation=250mW, Min Operating Temperature=-55degC, Package Description="2-Pin Surface Mount Device, Body 3.1 x 1.6 mm", Package Quantity=5000, Package Reference=1206.0, Resistance=10K, Resistance Tolerance=1%, Resistor Type="Thick Film", Supplier Part Number 1=311-10.0KFRCT-ND, Temperature Coefficient=100ppm/degreesC, Voltage Rating=200V, Case/Package=1206, Category="Chip SMD Resistors", ComponentLink1Description=https://datasheet.ciiva.com/46445/444357-46445703.pdf?src-supplier=Element14, ComponentLink1URL=https://datasheet.ciiva.com/46445/444357-46445703.pdf?src-supplier=Element14, ComponentLink2Description=https://datasheet.ciiva.com/7857/1692832-7857244.pdf?src-supplier=Element14, ComponentLink2URL=https://datasheet.ciiva.com/7857/1692832-7857244.pdf?src-supplier=Element14, ComponentLink3Description=https://datasheet.ciiva.com/7857/1692832-7857245.pdf?src-supplier=Element14, ComponentLink3URL=https://datasheet.ciiva.com/7857/1692832-7857245.pdf?src-supplier=Element14, Composition=ThickFilm, Construction=Rectangular, Datasheet URL=http://www.yageo.com/NewPortal/yageodocoutput?fileName=/pdf/R-Chip/PYu-RC_Group_51_RoHS_L_5.pdf, Datasheet Version="Rev. 5, 10/2016", Depth=1.6mm, Features="Moisture Resistant", Height=0.55mm, Lead Free=LeadFree, Length=3.1mm, Manufacturer Part Number=RC1206FR-0710KL, Manufacturer URL=http://www.yageo.com/, Military Standard=Not, Number of Terminations=2, Packaging=TapeandReel, Power Rating=250mW, Pricing 1="1=0.10000, 10=0.03700, 100=0.02040, 1000=0.01236, 2500=0.01036 (USD)", REACH SVHC=Unknown, RoHS=Yes, RoHS Compliant=Yes, RoHSCompliant=true, Series=RC, Size Code=1206, Stock 1=3827063, Supplier 1=Digi-Key, Supplier 2=Newark, Supplier Part Number 2=98K7621, Termination=SMD/SMT, Tolerance=1%, Width=1.6mm
SW1: library part CMP-2100-03586-2, "SWITCH TACTILE SPST-NO 0.05A 12V", Contact Current Rating=50mA, Contact Resistance=100mR, Insulation Resistance=100MR, Manufacturer=Omron, Max Operating Temperature=70°C, Max Voltage Rating (DC)=12V, Min Operating Temperature=-25°C, Operating Force=1.5N, Package Quantity=1, Ratings="Dust Proof", Supplier Part Number=SW1020CT-ND, Actuator Length=0.4mm, Actuator Type=Standard, Category="Tactile Switches", Contact Material=Silver, Current Rating=50mA, Depth=2.5mm, Electrical Life=200000Cycles, Height=1.2mm, Illumination Type=Non-Illuminated, Lead Free="Lead Free", Length=4mm, Manufacturer Part Number=B3U-1000P, Max Current Rating=50mA, Mechanical Life=200000Cycles, Mount="Surface Mount", Mounting Technology="Surface Mount", Orientation=Straight, Packaging="Tape and Reel", Pricing="1=1.02, 10=0.983, 25=0.9188, 100=0.7977, 250=0.72584, 500=0.67292, 1000=0.62377 (USD)", Reach SVHC Compliant=Unknown, RoHS=Yes, RoHS Compliant=Yes, Series=B3U, Stock=65266, Supplier=Digi-Key, Switch Function=Off-Mom, Switch Travel=0.15mm, Termination=SMD/SMT, Throw Configuration=SPST, Voltage Rating (DC)=12V, Weight=0.000776oz, Width=3mm
TP1 TP2 TP3: library part CMP-1672-00008-1, "Test Point, 1 Position SMD, RoHS, Tape and Reel", Package Quantity=1000, ComponentLink1Description="Manufacturer URL", ComponentLink1URL=http://www.keyelco.com/, ComponentLink2Description=Datasheet, ComponentLink2URL=http://www.keyelco.com/product-pdf.cfm?p=1357, Contact Plating=Silver, DatasheetVersion=03/2014, Mount="Surface Mount", Mounting Technology="Surface Mount", PackageDescription="1-Pin Surface Mount Device, Body 3.81 x 2.03 mm", PackageReference=5019, Packaging="Tape and Reel", Pins=1, RoHSCompliant=True
U1: "Bucky Badger Image", Manufacturer Part Number="UW Bucky"
U2: "Switch Tactile OFF (ON) SPST Round Button Gull Wing 0.05A 12VDC 1.57N SMD", Case/Package=SMD/SMT, Contact Rating @ Voltage="0.05A @ 12VDC", Current Rating=50mA, Illumination Type, Color=-, Manufacturer=E-Switch, Max Operating Temperature=70°C, Min Operating Temperature=-25°C, Operating Force=160gf, Operating Temperature="-25°C ~ 70°C", Package Quantity=1, Supplier Part Number=EG4906CT-ND, Voltage Rating (DC)=12V, Actuator Height off PCB, from Pins=4.30mm, Actuator Material=-, Actuator Orientation="Top Actuated", Actuator Type=Standard, Category=Switches, Circuit=SPST-NO, ComponentLink1Description=https://datasheet.ciiva.com/2900/n301101-2900856.pdf?src-supplier=Digi-Key, ComponentLink1URL=https://datasheet.ciiva.com/2900/n301101-2900856.pdf?src-supplier=Digi-Key, ComponentLink2Description=https://datasheet.ciiva.com/2900/n301101-2900858.pdf?src-supplier=Digi-Key, ComponentLink2URL=https://datasheet.ciiva.com/2900/n301101-2900858.pdf?src-supplier=Digi-Key, Contact Plating=Silver, Features=-, Illumination=Non-Illuminated, Illumination Type=Non-Illuminated, Illumination Voltage (Nominal)=-, Ingress Protection=-, Manufacturer 1=E-Switch, Manufacturer Part Number=TL3300DF160Q, Manufacturer Part Number 1=TL3300DF160Q, Mechanical Life="200,000 Cycles", Mount="Surface Mount", Mounting Type="Surface Mount", Outline="12.00mm x 12.00mm", Packaging="Cut Tape (CT)", Pricing 1="1=0.60000, 10=0.57800, 25=0.55680, 100=0.48180, 250=0.43896 (USD)", RoHS="RoHS Compliant", RoHS Compliant=Yes, Series=TL3300, Stock 1=57403, Supplier=Digi-Key, Supplier 1=Digi-Key, Supplier Part Number 1=EG4906CT-ND, Switch Function=Off-Mom, Switch Travel=0.35mm, Termination="Gull Wing", Termination Style="Gull Wing", Throw Configuration=SPST
U3: library part CMP-0395-00503-2, "Single Output LDO, 1 A, Fixed 3.3 V Output, 2 to 5.5 V Input, 4-pin SOT-223 (DCY), -40 to 125 degC, Green (RoHS & no Sb/Br)", Manufacturer="Texas Instruments", Accuracy(%)=2, Code_JEDEC=TO-261, ComponentLink1Description="Manufacturer URL", ComponentLink1URL=http://www.ti.com/, ComponentLink2Description=Datasheet, ComponentLink2URL=http://www.ti.com/general/docs/lit/getliterature.tsp?genericPartNumber=TLV1117LV33&fileType=pdf, ComponentLink3Description="Package Specification", ComponentLink3URL=http://www.ti.com/litv/pdf/mpds094a, DatasheetVersion=SBVS160A, Eco-Plan="Green (RoHS & no Sb/Br)", Fixed Output Options(V)=3.3, Iout(Max)(A)=1, Iq(Typ)(mA)=0.05, Mounting Technology="Surface Mount", PackageDescription="4-Pin Plastic Small Outline, Body 3.5 x 6.5 mm, Pitch 2.3 mm", PackageReference=DCY0004A, PackageVersion=4202506/B, PartNumber=TLV1117LV33DCYR, SubFamily="Single Channel LDO", Vdo(Typ)(mV)=1200, Vin(Max)(V)=5.5, Vin(Min)(V)=2, Vout Adj(Max)(V)=3.3, Vout Adj(Min)(V)=3.3
U4: library part CMP-0859-00043-4, "IC GATE AND 1CH 2-INP SOT23-5", Ambient Temperature Range High=+125°C, Ambient Temperature Range Low=-55°C, Case/Package=SOT-23, High Level Output Current=-8mA, Low Level Output Current=8mA, Manufacturer="Texas Instruments", Max Junction Temp=+150°C, Max Operating Temperature=125°C, Max Supply Voltage=5.5V, Min Supply Voltage=2V, Nominal Supply Current=1uA, Package=DBV0005A, Package Quantity=3000, Supplier Part Number=296-1091-1-ND, Temperature="-55°C to +125°C", Automotive=No, Category=IC, ComponentLink2Description=Datasheet, ComponentLink2URL=http://www.ti.com/lit/ds/symlink/sn74ahc1g08.pdf, Device Class L1="Integrated Circuits (ICs)", Device Class L2="Logic ICs", Device Class L3="Logic Gates", Digikey Description="IC GATE AND 1CH 2-INP SOT23-5", Height=1.45mm, Lead Free=Yes, Length=2.9mm, Logic Function="AND GATE", Logic Function Desc=Non-Inverting, Manufacturer Part Number=SN74AHC1G08DBVR, Max Output Current=8mA, Min Operating Temperature=-55°C, Mounting Technology="Surface Mount", Mouser Description="AND Gate 1-Element 2-IN CMOS 5-Pin SOT-23 AND Gate 1-Element 2-IN CMOS 5-Pin SOT-23 AND Gate 1-Element 2-IN CMOS 5-Pi...", Number of Bits=1, Number Of Circuits=1, Number of Elements=1, Number of Gates=1, Number of Input Lines=2, Number Of Inputs=2, Number of Output Lines=1, Number Of Outputs=1, Octopart=https://octopart.com/sn74ahc1g08dbvr-texas+instruments-464404, Output Current=8mA, Packaging="Tape and Reel", Pins=5, Pricing="1=0.34, 10=0.25, 25=0.2184, 100=0.1413, 250=0.117, 500=0.0936, 1000=0.07176 (USD)", Propagation Delay=5.8ns, Quiescent Current=1uA, Radiation Hardening=No, Reach SVHC Compliant=No, RoHS=TRUE, RoHS Compliant=Yes, Series=74AHC, Standoff Height=0mm, Stock=156425, Supplier=Digi-Key, Technology=CMOS, Temperature Range High=+125°C, Temperature Range Low=-55°C, Termination=SMD/SMT, Turn-On Delay Time=12.3ns, Weight=0.000557oz, Width=1.6mm
z1: "ARM Microcontrollers - MCU PSoC4", Manufacturer 1=Infineon, Supplier Part Number 1=448-CY8C4045AZI-S413-ND, Category=Uncategorized, Drawn By="Pei Yu Lin", Manufacturer Part Number 1=CY8C4045AZI-S413, Pricing 1="1=3.87, 10=3.474, 25=3.284, 80=2.846, 250=2.70008, 500=2.42276, 1000=2.0433, 2500=1.946 (USD)", RoHS=Yes, RoHS Compliant=Yes, Stock 1=12044, Supplier 1=Digi-Key

## Via types
v1: diameter 0.6, hole 0.3, Top Layer to Bottom Layer, 120 vias

## Nets (pads, with @x,y where several pads share a name; then routed paths per layer and width w, separated by ;. In a path a pad name is that pad's centre, name@x,y a point inside that pad or via, vN(x,y) a via of type N, cw(c..) or ccw(c..) an arc to the next point about the centre after c; other vN are vias at no path point)
3.3V: C2.1 C3.1 C4.1 Cin1.1 D1.1 J1.5 LS1.P R5.2 R15.2 R16.2 TP1.1 U3.2 U3.4 U4.5 z1.21 z1.39 z1.40 | length 10.4
  Top Layer w0.3: C2.1 41.42,50.25 42.82,51.65 44.14,51.65 44.29,51.5 z1.40
  Bottom Layer w0.3: v1(84,13.5) LS1.P
5.0V: Cin2.1 J2.3 J3.3 J4.1 J4.2 J4.3 J5.1 J5.2 J5.3 R1.1 R2.1 R3.1 R4.1 R6.1 R7.1 R8.1 R9.1 R10.1 R11.1 R12.1 R13.1 TP2.1 U3.3 | length 85
  Top Layer w0.2: Cin2.1 23,14.117 23.117,14 TP2.1 ; v1(71,58.1) R3.1@81.474,58.1 ; 71.31,76.049 71.439,75.92 J3.3 ; v1(79.86,38) R6.1 81.474,40.543 81.591,40.66 86.285,40.66 86.788,41.162 86.788,46.168 86.67,46.285 81.591,46.285 81.474,46.168 R4.1 ; v1(79.86,57.34) 80.896,57.34 81.474,57.918 R3.1
  Bottom Layer w0.2: v1(71,58.1) v1(71,75.905) ; v1(79.86,38) v1(79.86,57.34)
BTN_IN: R5.1 U2.3 U2.4 z1.45 | length 38.6
  Top Layer w0.2: v1(44.15,49) z1.45 ; v1(47.318,62.2) 51.924,62.2 52.05,62.326 R5.1
  Bottom Layer w0.2: U2.3 44.542,43 44.15,43.392 44.15,61.804 44.546,62.2 v1(47.318,62.2) 47.318,57.182 U2.4
BUZZER: Q13.1 R14.2 z1.44 | length 55.4
  Top Layer w0.2: v1(43,32.915) 73.763,32.915 74,32.678 R14.2 74.412,31.437 Q13.1 ; v1(43.05,49.6) 44.914,49.6 44.964,49.55 45.073,49.55 45.123,49.5 z1.44
  Bottom Layer w0.2: v1(43,32.915) 43.05,32.965 v1(43.05,49.6)
BUZZER_Q: D1.2 LS1.N Q13.3 | length 19.2
  Top Layer w0.2: Q13.3 D1.2
  Top Layer w0.5: D1.2 v1(88,30.487)
  Bottom Layer w0.5: LS1.N 88,21 v1(88,30.487)
EN_G1: Q1.1 z1.20 | length 28.8
  Top Layer w0.2: Q1.1 54.05,71 55.117,72.067 v1(57.75,72.067) ; z1.20 v1(57.75,51)
  Bottom Layer w0.2: v1(57.75,51) v1(57.75,72.067)
EN_G2: Q2.1 z1.19 | length 24.2
  Top Layer w0.2: z1.19 56.397,50.5 56.497,50.4 v1(58.881,50.4) ; v1(59,65.901) 62.951,65.901 Q2.1
  Bottom Layer w0.2: v1(58.881,50.4) 58.94,50.46 58.94,65.842 v1(59,65.901)
EN_G3: Q3.1 z1.18 | length 22.1
  Top Layer w0.2: z1.18 56.913,50 57.113,49.8 59.75,49.8 v1(59.95,50) ; v1(59.859,57) 68.95,57 Q3.1
  Bottom Layer w0.2: v1(59.859,57) 59.95,56.909 v1(59.95,50)
EN_G4: Q4.1 z1.17 | length 18.3
  Top Layer w0.2: z1.17 56.847,49.5 56.947,49.4 60.871,49.4 v1(60.963,49.491) ; v1(60.972,46) 68.95,46 Q4.1
  Bottom Layer w0.2: v1(60.963,49.491) 60.963,46.009 v1(60.972,46)
EN_R1: Q9.1 z1.2 | length 22.6
  Top Layer w0.2: Q9.1 44.641,45.95 44.974,45.617 44.974,44.417 45.092,44.3 47.418,44.3 47.75,44.632 z1.2
EN_R2: Q10.1 z1.3 | length 55
  Top Layer w0.2: v1(23.95,57) 27.95,57 Q10.1 ; v1(23.962,38.434) v1(48.574,38.434) ; z1.3 48.269,45.981 48.269,44.373 v1(48.342,44.3)
  Bottom Layer w0.2: v1(23.95,57) 23.962,56.988 v1(23.962,38.434) ; v1(48.342,44.3) 48.342,44.192 48.6,43.934 48.6,38.46 v1(48.574,38.434)
EN_R3: Q11.1 z1.4 | length 48.7
  Top Layer w0.2: v1(27,61) v1(48.739,61) ; v1(27,65.796) 27.108,65.796 27.263,65.95 Q11.1 ; v1(48.619,49.892) 48.75,49.761 48.75,46.023 z1.4@48.739,46.011
  Bottom Layer w0.2: v1(27,61) v1(27,65.796) ; v1(48.619,49.892) 48.619,55.856 48.739,55.975 v1(48.739,61)
EN_R4: Q12.1 z1.5 | length 36.8
  Top Layer w0.2: v1(42.37,70.84) 42.478,70.84 42.639,71 43.95,71 Q12.1 ; v1(42.4,59.119) 42.46,59.06 49.279,59.06 v1(49.339,59) ; z1.5 49.25,51.295 v1(49.279,51.324)
  Bottom Layer w0.2: v1(42.37,70.84) 42.294,70.763 42.003,70.763 40.305,69.066 38.608,67.368 38.608,62.912 v1(42.4,59.119) ; v1(49.279,51.324) 49.309,51.354 49.309,58.97 v1(49.339,59)
EN_Y1: Q5.1 z1.6 | length 24.4
  Top Layer w0.2: v1(49.4,37) 63.358,37 64,36.358 Q5.1 ; v1(49.4,44) 49.4,44.679 49.75,45.029 z1.6
  Bottom Layer w0.2: v1(49.4,37) v1(49.4,44)
EN_Y2: Q6.1 z1.7 | length 20.4
  Top Layer w0.2: v1(50,31.255) 53.645,31.255 54.95,29.95 Q6.1 ; v1(50,42.119) 50,44.714 50.25,44.964 z1.7
  Bottom Layer w0.2: v1(50,31.255) v1(50,42.119)
EN_Y3: Q7.1 z1.8 | length 22.4
  Top Layer w0.2: Q7.1 43.05,29.95 45.269,32.169 v1(50.6,32.169) ; v1(50.6,43) 50.6,44.748 50.75,44.898 z1.8
  Bottom Layer w0.2: v1(50.6,32.169) v1(50.6,43)
EN_Y4: Q8.1 z1.9 | length 27.3
  Top Layer w0.2: Q8.1 v1(51.281,35.95) ; v1@51.249,44.016 z1.9
  Bottom Layer w0.2: v1(51.249,44.015) 51.265,43.999 51.265,35.966 v1(51.281,35.95)
GND: C1.2 C2.2 C3.2 C4.2 Cin1.2 Cin2.2 J1.4 J2.1 J3.1 J4.7 J4.8 J4.S1 J4.S2 J5.7 J5.8 J5.S1 J5.S2 Q1.2 Q2.2 Q3.2 Q4.2 Q5.2 Q6.2 Q7.2 Q8.2 Q9.2 Q10.2 Q11.2 Q12.2 Q13.2 R14.1 SW1.1 TP3.1 U2.1 U2.2 U3.1 U4.3 z1.10 z1.38 z1.41 | length 47.9
  Top Layer w0.2: v1(18,18.2) Cin2.2 ; v1(20.73,26) U3.1 ; v1(26.634,55.1) 27.95,55.1 Q10.2 ; v1(26.735,44.012) 26.774,44.05 Q9.2 ; v1(32.66,64) 33.95,64 Q11.2 ; v1(32.8,34) 33.95,34 Q8.2 ; v1(33,18) Cin1.2 ; v1(34.631,54) C1.2 ; v1(34.75,50.25) C2.2 ; v1(34.75,58) C4.2 ; v1(43.55,51) z1.41 ; v1(43.55,52.513) 43.557,52.507 45.743,52.507 z1.38 ; v1(51.746,47.75) 51.748,47.748 51.748,46.002 z1.10 ; v1(53.881,28.05) Q6.2 ; v1(62.322,34) 63.95,34 Q5.2 ; C3.2 v1(66.9,53) 68.95,55.05 Q3.2 ; v1(67.6,44.015) 68.965,44.015 Q4.2 ; U4.3 v1(85.936,55.05)
  Top Layer w0.3: v1(41.347,28.05) Q7.2 ; v1(41.8,69.1) 41.825,69.075 43.975,69.075 Q12.2 ; v1(52.926,69.1) Q1.2 ; v1(61.471,64.05) Q2.2 ; v1(74,26.187) R14.1 ; v1(77,28.3) Q13.2 ; v1(78,14) TP3.1 ; J1.4 95.554,52.54 v1(95.557,52.543)
LED_G1: LED_G1.1 R1.2 | length 18.6
  Top Layer w0.2: v1(48.235,85) R1.2
  Bottom Layer w0.2: v1(48.235,85) 48.279,84.955 48.279,70 48.579,69.7 LED_G1.1
LED_G2: LED_G2.1 R2.2 | length 18.4
  Top Layer w0.2: v1(58.4,84.901) 59.901,84.901 R2.2
  Bottom Layer w0.2: v1(58.4,84.901) 58.4,69.791 59.35,68.841 LED_G2.1
LED_G3: LED_G3.1 R3.2 | length 28
  Top Layer w0.2: v1(66.748,64.39) 66.796,64.438 84.552,64.438 v1(84.6,64.486) ; v1(84.514,59.94) 84.526,59.929 R3.2
  Bottom Layer w0.2: LED_G3.1 66.686,60.962 66.686,64.327 v1(66.748,64.39) ; v1(84.514,59.94) 84.557,59.983 84.557,64.443 v1(84.6,64.486)
LED_G4: LED_G4.1 R4.2 | length 22.6
  Top Layer w0.2: v1(72,43) 84.409,43 84.526,43.117 R4.2
  Bottom Layer w0.2: LED_G4.1 72,49.75 v1(72,43)
LED_R1: LED_R1.1 R10.2 | length 17.9
  Top Layer w0.3: R10.2 18.847,40.836 19.022,40.66 v1(29.775,40.66)
  Bottom Layer w0.3: v1(29.775,40.66) 29.775,38.031 LED_R1.1
LED_R2: LED_R2.1 R11.2 | length 8.3
  Top Layer w0.2: R11.2 19.112,50.25 v1(27.075,50.25)
LED_R3: LED_R3.1 R12.2 | length 19.6
  Top Layer w0.2: R12.2 v1(22,55.05) ; v1(22,62.684) 22.005,62.68 30.826,62.68 v1(30.831,62.675)
  Bottom Layer w0.2: v1(22,55.05) v1(22,62.684)
LED_R4: LED_R4.1 R13.2 | length 17.4
  Top Layer w0.2: v1(38.358,85) R13.2
  Bottom Layer w0.2: LED_R4.1 38.229,69.431 38.229,84.771 38.358,84.901 v1(38.358,85)
LED_Y1: LED_Y1.1 R6.2 | length 19.4
  Top Layer w0.2: v1(67,39.784) 75.592,39.784 78.606,36.771 83.548,36.771 84.526,37.749 R6.2
LED_Y2: LED_Y2.1 R7.2 | length 18.6
  Top Layer w0.2: v1(59.259,17) 60,16.259 R7.2
  Bottom Layer w0.2: v1(59.259,17) 59.336,17.077 59.336,32.449 59.613,32.726 LED_Y2.1
LED_Y3: LED_Y3.1 R8.2 | length 11.9
  Top Layer w0.2: R8.2 v1(50,16.491)
  Bottom Layer w0.2: v1(50,16.491) LED_Y3.1
LED_Y4: LED_Y4.1 R9.2 | length 15.5
  Top Layer w0.2: v1(39.888,17) 39.888,15.164 R9.2
  Bottom Layer w0.2: LED_Y4.1 39.888,28.267 v1(39.888,17)
LEDQ_G1: LED_G1.2 Q1.3 | length 7.5
  Top Layer w0.2: v1(51.746,70.119) 55.931,70.119 Q1.3
  Bottom Layer w0.2: LED_G1.2 50.25,72.05 50.25,71.124 51.178,70.196 51.67,70.196 v1(51.746,70.119)
LEDQ_G2: LED_G2.2 Q2.3 | length 9.6
  Top Layer w0.2: v1(61.471,67.125) 64.883,67.125 65,67.008 Q2.3
  Bottom Layer w0.2: LED_G2.2 60.65,70.559 61.471,69.738 v1(61.471,67.125)
LEDQ_G3: LED_G3.2 Q3.3 | length 11.7
  Top Layer w0.254: v1(70,53.9) 70.861,53.9 71.009,54.049 Q3.3@71.009,55.991
  Bottom Layer w0.2: LED_G3.2 69,61.75 70,60.75 v1(70,53.9)
LEDQ_G4: LED_G4.2 Q4.3 | length 8.2
  Top Layer w0.2: v1(68.519,47.486) 68.545,47.46 70.883,47.46 71,47.343 Q4.3
  Bottom Layer w0.2: LED_G4.2 68.519,50.631 v1(68.519,47.486)
LEDQ_R1: LED_R1.2 Q9.3 | length 7.2
  Top Layer w0.2: Q9.3 30.024,44.976 v1(31.171,44.976)
  Bottom Layer w0.2: v1(31.171,44.976) 31.171,40.323 LED_R1.2
LEDQ_R2: LED_R2.2 Q10.3 | length 5.5
  Top Layer w0.2: v1(30,50.5) Q10.3
LEDQ_R3: LED_R3.2 Q11.3 | length 5.9
  Bottom Layer w0.2: LED_R3.2 34.06,62.216 35.883,62.216 36,62.333 v1(36,65)
LEDQ_R4: LED_R4.2 Q12.3 | length 8.8
  Top Layer w0.254: v1(46,67.356) Q12.3
  Bottom Layer w0.254: LED_R4.2 39.961,67.359 45.997,67.359 v1(46,67.356)
LEDQ_Y1: LED_Y1.2 Q5.3 | length 6.1
  Top Layer w0.254: v1(66,35) 66.037,35.037 v1(69.094,35.037)
  Bottom Layer w0.254: v1(69.094,35.037) 69.094,37.9 LED_Y1.2
LEDQ_Y2: LED_Y2.2 Q6.3 | length 5.1
  Top Layer w0.2: Q6.3 57.25,29.25 v1(60,29.25)
  Bottom Layer w0.2: v1(60,29.25) 60.077,29.327 60.077,29.541 60.963,30.427 LED_Y2.2
LEDQ_Y3: LED_Y3.2 Q7.3 | length 5.3
  Top Layer w0.2: Q7.3 v1(47.682,29)
  Bottom Layer w0.2: v1(47.682,29) 48.382,29.7 LED_Y3.2
LEDQ_Y4: LED_Y4.2 Q8.3 | length 5.9
  Top Layer w0.2: Q8.3 38.653,35 v1(38.681,35)
  Bottom Layer w0.2: v1(38.681,35) 39.6,34.081 39.6,32.244 LED_Y4.2
MCU_RST: J1.3 R16.1 SW1.2 U4.2 | length 29.3
  Top Layer w0.2: J1.3 v1(92.105,50)
  Top Layer w0.25: U4.2 90.085,54.1 90.085,50.2 J1.3 89.905,50 88.884,48.979 R16.1
  Bottom Layer w0.2: SW1.2 92.105,61.895 v1(92.105,50)
SWD_CLK: J1.2 z1.16 | length 40.1
  Top Layer w0.2: z1.16 60.605,49 60.955,48.65 71.733,48.65 72.604,47.779 93.396,47.779 J1.2
SWD_DATA: J1.1 z1.14 | length 38.4
  Top Layer w0.2: z1.14 54.877,48 54.927,48.05 55.036,48.05 55.236,48.25 71.568,48.25 72.818,47 89.739,47 90.285,46.454 J1.1
SYS_RST: J4.6 J5.6 R15.1 U4.1 | length 148.8
  Top Layer w0.25: v1(4.147,87) v1(78.6,87) ; U4.1 v1(86.811,53.15) ; v1(86.811,62) R15.1 84.526,62.275 86.641,64.39 86.692,64.39 86.788,64.486 95.238,64.486 96,65.248 96,72.838 96.09,72.928 96.998,72.928 J5.6
  Bottom Layer w0.25: J4.6 4.147,78.217 v1(4.147,87) ; v1(78.6,87) 78.6,76.259 86.811,68.048 v1(86.811,62) v1(86.811,53.15)
UART0_RX: J2.4 J4.4 z1.22 | length 124.8
  Top Layer w0.3: J4.4 13.411,74.365 14.396,73.38 J2.4 ; v1(7.179,88) v1(57,88) ; z1.22 56.959,52 v1(57,52.041)
  Bottom Layer w0.3: v1(7.179,74.365) v1(7.179,88) ; v1(57,52.041) v1(57,88)
  other v1: 4.393,74.365
UART0_TX: J2.5 J4.5 z1.23 | length 122.7
  Top Layer w0.3: J4.5 5.449,75.709 8.943,75.709 v1(9,75.767) ; v1(8.943,71.439) 16.509,71.439 17.108,70.84 J2.5 ; v1(9,89) v1(56,89) ; z1.23 55.824,52.5 55.943,52.618 55.943,52.943 v1(56,53)
  Bottom Layer w0.3: v1(8.943,71.439) 8.971,71.468 8.971,75.738 v1(9,75.767) v1(9,89) ; v1(56,53) v1(56,89)
UART1_RX: J3.4 J5.5 z1.12 | length 79.6
  Top Layer w0.3: z1.12 53.881,46 v1(54,45.881) ; v1(54,41) v1(72.928,41) ; v1(72.893,73.347) 72.909,73.363 74.983,73.363 J3.4 75.985,74.365 J5.5
  Bottom Layer w0.3: v1(54,41) v1(54,45.881) ; v1(72.893,73.347) 72.91,73.329 72.91,41.018 v1(72.928,41)
UART1_TX: J3.5 J5.4 z1.13 | length 85.1
  Top Layer w0.254: z1.13 v1(59.831,47.5) ; v1(59.859,42) v1(78,42) ; v1(78,75.635) J5.4
  Bottom Layer w0.254: v1(59.831,47.5) 59.845,47.486 59.845,42.014 v1(59.859,42) ; J3.5 78,70.84 ; v1(78,42) 78,54.793 77.973,54.82 77.973,55.34 78,55.367 78,59.713 77.973,59.74 77.973,60.26 78,60.287 78,70.84 ; v1(78,75.635) 78,70.84
VCCD: C1.1 z1.37 | length 6.9
  Top Layer w0.3: C1.1@39.5,53.8 C1.1 44.15,54 45.15,53 z1.37
XRES: U4.4 z1.36 | length 47.6
  Top Layer w0.2: v1(46,54.45) 47.204,54.45 47.25,54.496 z1.36 ; v1(46,59.881) 46.06,59.94 78.54,59.94 v1(78.6,60) ; v1(78.6,55.08) 78.63,55.05 U4.4
  Bottom Layer w0.2: v1(46,54.45) v1(46,59.881) ; v1(78.6,55.08) v1(78.6,60)
pads on no net: J2.2 J2.6 J3.2 J3.6 J4.MH1 J4.MH2 J5.MH1 J5.MH2 LS1.M1 LS1.M2 MH1.1 MH2.1 MH3.1 MH4.1 z1.1 z1.11 z1.15 z1.24 z1.25 z1.26 z1.27 z1.28 z1.29 z1.30 z1.31 z1.32 z1.33 z1.34 z1.35 z1.42 z1.43 z1.46 z1.47 z1.48

## Polygon pours and split planes (outlines as drawn)
5.0V on Top Layer "T_5V" (solid, remove dead copper, pour order 5): 3,100 -0.003,96.997 0.29,3.29 3.327,0.254 96,0 100,3 99.795,96 97,100
3.3V on Top Layer "T_3V3" (solid, remove dead copper, pour order 4): 92,69.278 92,13 90,11 27,11 25,13 25,22 24,23 21.05,23 18.847,25.203 18.847,35 20.847,37 35.45,37 36,37.55 36,68.7 39.463,72.163 89,72.163
GND on Bottom Layer "T_GND" (solid, remove dead copper, pour order 6): 3,100 0,97 0,4 4,0 96.338,0 100,3.662 100,96.458 98.978,98.299 96.604,100

## Keep-outs
Keep-Out Layer:
  lines w0.254: -0.127,4.999 -0.127,95.25 ; 5,-0.127 95,-0.127 ; 100.127,5 100.127,95

## Silkscreen, mask and mechanical layers (free items; w line width, h text height)
Top Overlay:
  lines w0.5: 0,10 99.961,10 ; 0,90 99.961,90
  text "No Components Above Line" at 32.254,93.762 h1.52
  text "VTARG" at 94.174,55.681 h1.27
  text "SWDIO" at 94.218,43.681 h1.27
  text "3V3" at 71.508,21.254 h1
  text "GND" at 71.508,15.306 h1
  text "5V" at 28.254,11.254 h1